# Altium PCB PCB1.PcbDoc
Units mil, origin at the board's own origin, x right, y up, seen from the top; angles counter-clockwise.
Board outline 1760 x 765 mil, 2 copper layers (Top Layer, Bottom Layer); 19 components, 17 nets, 62 pads, 10 vias.
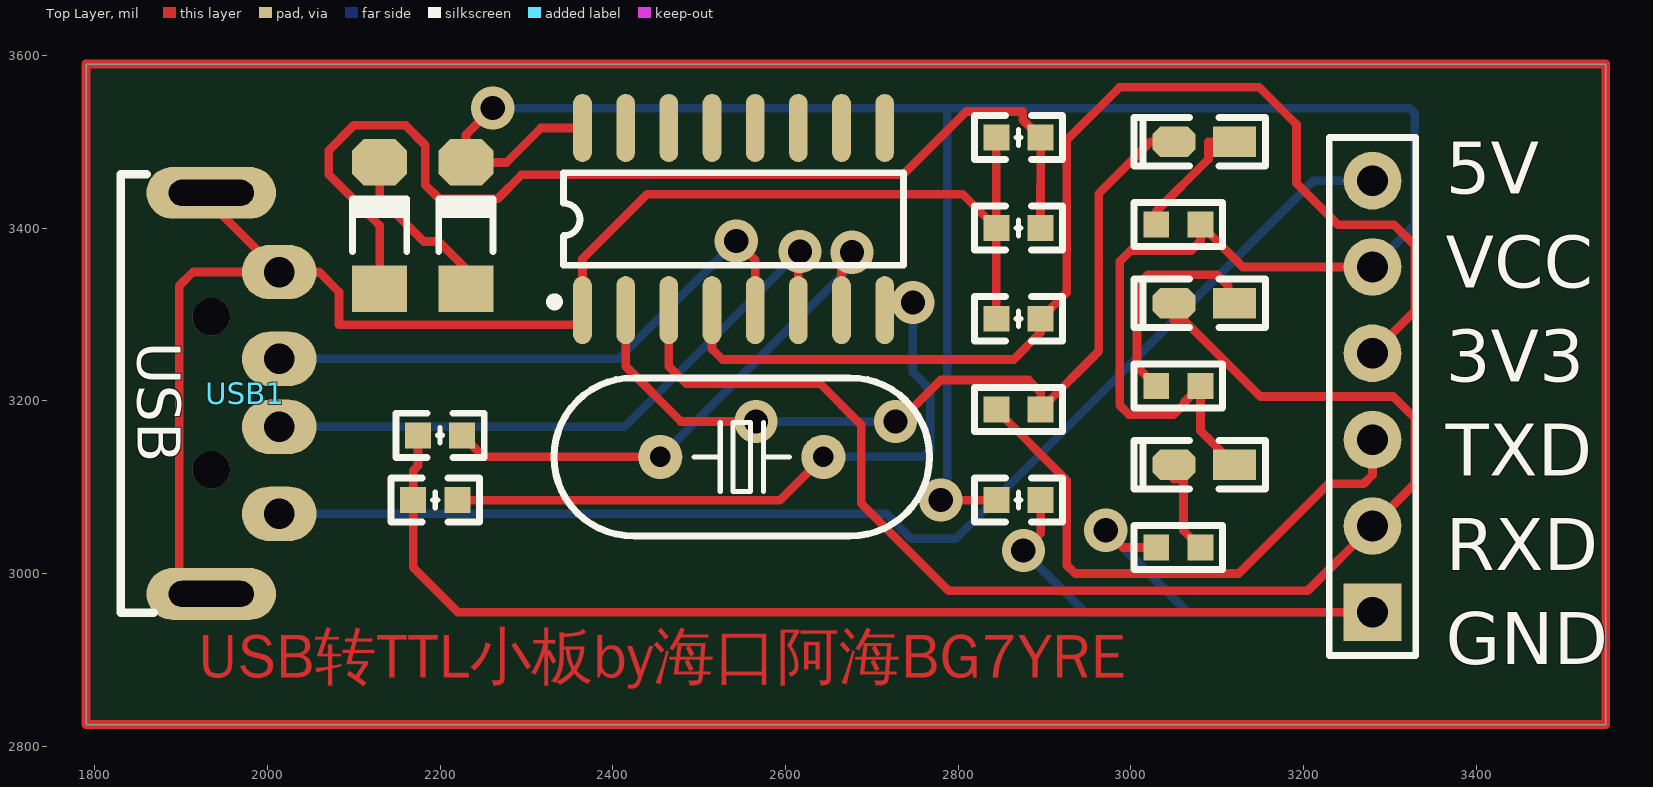
[diagram p0: Top Layer view]
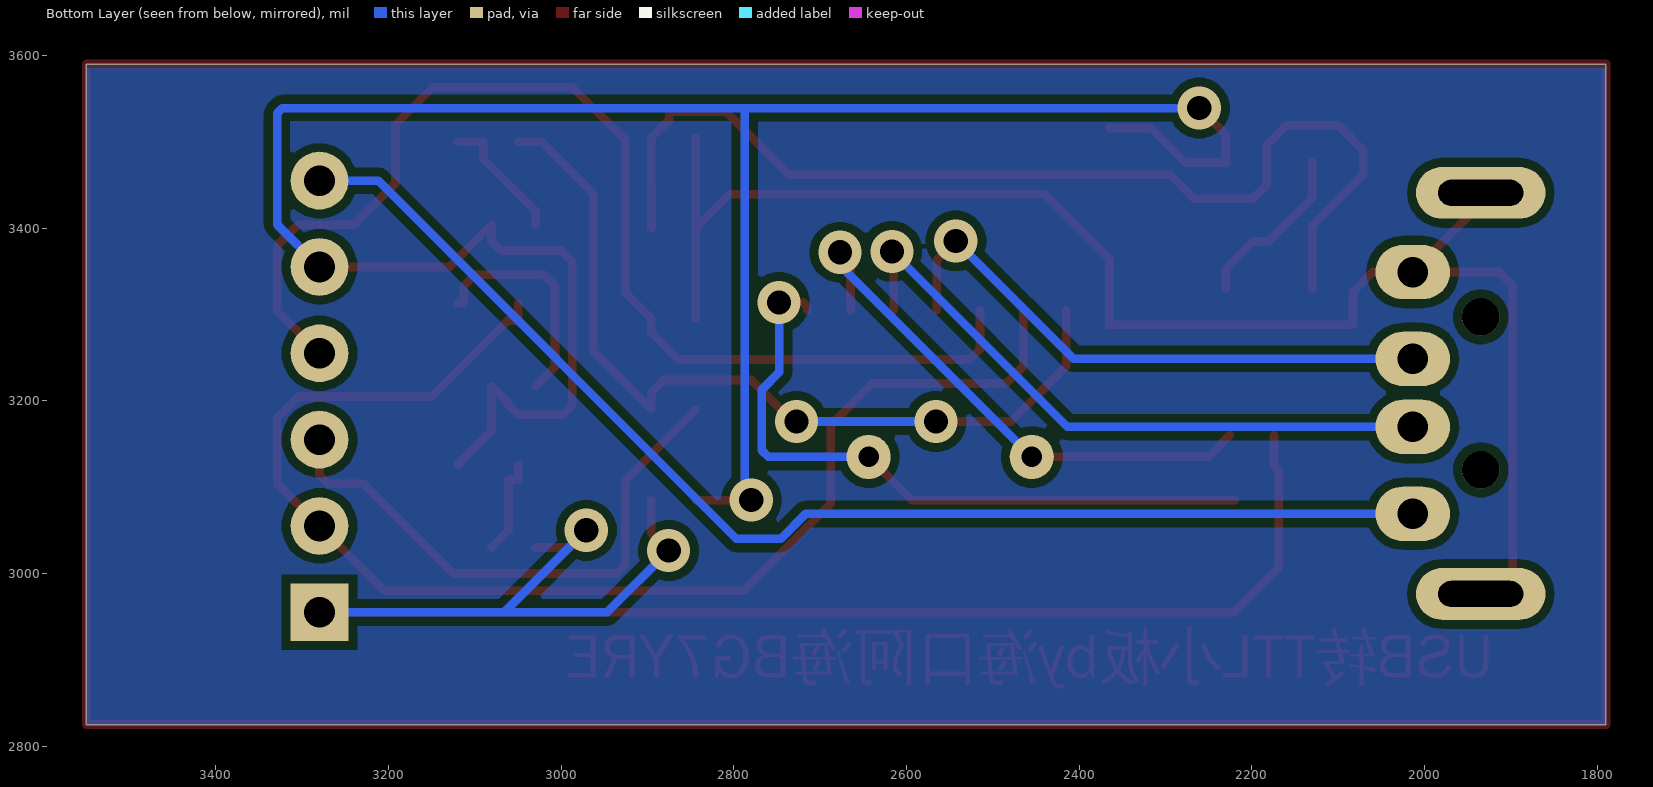
[diagram p1: Bottom Layer view, seen from below]

## Layer stack, top to bottom
Top Solder: solder mask 0.4, Solder Resist, Dk 3.5
Top Layer: signal copper 1.4
Dielectric 1: dielectric 12.6, FR-4, Dk 4.8
Bottom Layer: signal copper 1.4
Bottom Solder: solder mask 0.4, Solder Resist, Dk 3.5

## Board outline
1790,2825 1790,3590 3550,3590 3550,2825

## Design rules (kind name [scope] priority, off if disabled: settings)
Clearance [All] p1: gap=10 ignorepadtopadclearanceinfootprint=FALSE except(0: Arc-Hole Track-Hole SMDPad-Hole THPad-Hole Via-Hole Fill-Hole Poly-Hole Region-Hole Text-Hole)
PolygonConnect [All] p1: connectstyle=Relief reliefconductorwidth=10 reliefentries=4 polygonreliefangle="90 Angle" airgapwidth=10
RoutingVias [All] p1: holewidth=28 width=50 viastyle="Through Hole" minholewidth=28 minwidth=50 maxholewidth=28 maxwidth=50
SolderMaskExpansion [All] p1: expansion=4 istentingtop=FALSE
Width [All] p1: maxlimit=10 minlimit=10 preferedwidth=10
30 further rules are at their usual default settings.

## Components (designator, comment, footprint, x,y, rotation, side; value= is the part's Value field where it differs from the comment)
1uf "104" "C 0603_L" 2870,3085 r0 top
12M "OSC49S" "OSC HC-49S" 2549.49,3135 r0 top
C2 "1uf" "C 0603_L" 2870,3505 r0 top
C3 "0.1uf" "C 0603_L" 2870,3400 r0 top
C4 "0.1uf" "C 0603_L" 2870,3295 r0 top
C5 "22p" "C 0603_L" 2194.41,3085 r0 top
C6 "22p" "C 0603_L" 2200,3160 r0 top
D1 "1N4148" "MINI_MELF (LL34)" 2130,3403.03 r90 top
D2 "1N4148" "MINI_MELF (LL34)" 2230,3403.03 r90 top
JP1 "HDR-1X6" HDR2.54-LI-6P 3280,3205 r90 top
LED1 "电源LED红色" "LED 0603R" 3085,3126.19 r180 top
LED2 "RXLED蓝色" "LED 0603B" 3085,3313.22 r180 top
LED3 "TXLED绿色" "LED 0603G" 3085,3500.26 r180 top
R1 "1.5K" "R 0603_L" 3055.18,3217.04 r0 top
R2 "1.5K" "R 0603_L" 3055.18,3404.08 r0 top
R3 "1.5K" "R 0603_L" 3055.18,3030 r0 top
R4 "1K" "R 0603_L" 2870,3190 r0 top
U1 "CH340G" SOP16 2540,3410 r90 top
USB1 "USB" USB_A/P_A 1935,3208.58 r270 top

## Footprints (in the part's own frame and the unit in brackets; to place one, negate y for a bottom-side part, rotate by r counter-clockwise, add the part's x,y. Pads: shape width x height; smd on the part's side, far side on the other; paste and mask are expansions set on the pad)
"C 0603_L" [mil] "无极性贴片电容                                       淘宝ID:黄晶宝石"
  rect 30x30 smd: 1(-25.59,0) 2(25.59,0)
  silkscreen extent -51,-26 51,26, body extent -31,-16 31,16, height 32
HDR2.54-LI-6P [mm] "排针，6脚"
  rect 1.7x1.7 hole 0.9: 1(-6.35,0)
  round 1.7 hole 0.9: 2(-3.81,0) 3(-1.27,0) 4(1.27,0) 5(3.81,0) 6(6.35,0)
  silkscreen extent -7.62,-1.27 7.62,1.27, body extent -7.62,-1.27 7.62,1.27, height 8.5
"LED 0603B" [mil] "蓝色0603LED                             淘宝ID:黄晶宝石"
  rect 50x35 smd: 1(-35,0.26)
  oct 50x35 smd: 2(35,0.26)
  silkscreen extent -71,-28 81,28, body extent -31,-16 32,16, height 24
"LED 0603G" [mil] "绿色0603LED                                   淘宝ID:黄晶宝石"
  rect 50x35 smd: 1(-35,0.26)
  oct 50x35 smd: 2(35,0.26)
  silkscreen extent -71,-28 81,28, body extent -31,-16 32,16, height 18
"LED 0603R" [mil] "红色0603LED                                           淘宝ID:黄晶宝石"
  rect 50x35 smd: 1(-35,0.26)
  oct 50x35 smd: 2(35,0.26)
  silkscreen extent -71,-28 81,28, body extent -31,-16 31,16, height 18
"MINI_MELF (LL34)" [mm] "1.5*3.4mm(直径，脚距）"
  rect 1.37x1.62 smd: 1(-1.855,0)
  oct 1.37x1.62 smd: 2(1.855,0)
  silkscreen extent -0.76,-0.8 0.78,0.8, body extent -1.7,-0.75 1.7,0.75, height 1.5
"OSC HC-49S" [mm] "封装库来自淘宝卖家 ID：黄晶宝石"
  round 1.3 hole 0.6: 1(-2.4,0) 2(2.4,0)
  silkscreen extent -5.52,-2.32 5.52,2.33, body extent -5.52,-2.32 5.53,2.33, height 4.13
"R 0603_L" [mil] "1/10W贴片电阻                 淘宝ID:黄晶宝石"
  rect 30x30 smd: 1(-25.59,0) 2(25.59,0)
  silkscreen extent -51,-26 51,26, body extent -31,-16 32,16, height 16
SOP16 [mm] "封装库来自淘宝卖家 ID：黄晶宝石"
  oval 2x0.55 smd: 1(-2.667,4.445) 2(-2.667,3.175) 3(-2.667,1.905) 4(-2.667,0.635) 5(-2.667,-0.635) 6(-2.667,-1.905) 7(-2.667,-3.175) 8(-2.667,-4.445) 9(2.692,-4.445) 10(2.692,-3.175) 11(2.692,-1.905) 12(2.692,-0.635) 13(2.692,0.635) 14(2.692,1.905) 15(2.692,3.175) 16(2.692,4.445)
  silkscreen extent -2.55,-5 1.37,5.39, body extent -2.92,-4.99 2.98,4.99, height 1.45
USB_A/P_A [mm] "A型USB 插头，20*13*4.5mm"
  round 1.1 hole 1.1: 0(-2.25,0) 0(2.25,0)
  oval 1.6x2.2 hole 0.9: 1(3.543,2) 2(0.987,2) 3(-1.013,2) 4(-3.569,2)
  oval 1.524x3.81 hole 0.762 slot 2.5 at 90 deg: 4(-5.9,0) 4(5.9,0)
  silkscreen extent -6.45,-2.67 6.45,-1.7, body extent -6.47,-17.9 6.47,2.1, height 3.25

## Part data
1uf C2 C3 C4 C5 C6: library part C, "贴片电容", BOM名称=无极性贴片电容, 唯一出售店铺网址=https://shop463601444.taobao.com, 淘宝ID="封装库来自淘宝 ID：黄晶宝石", 联系售后，技术支持=https://shop463601444.taobao.com
12M: "晶振49S"
D1 D2: "开关二极管", BOM名称=高速开关二极管, 欢迎光临=https://shop463601444.taobao.com, 淘宝ID="封装库来自淘宝 ID：黄晶宝石"
JP1: library part "Header 6", "6P接插件", BOM名称=6P接插件, 学习资源=https://shop463601444.taobao.com, 版权归属="封装库来自淘宝 ID：黄晶宝石"
LED1 LED2 LED3: library part LED-SMD, "贴片LED", BOM名称=贴片LED, 学习资源=https://shop463601444.taobao.com, 版权归属="封装库来自淘宝 ID：黄晶宝石"
R1 R2 R3 R4: library part R, "贴片电阻", BOM名称=贴片电阻, 封装库来自淘宝卖家 ID：黄晶宝石=其他店铺购入均为盗版，不享受售后技术支持服务，请立即申请退款, 版权归属="来自淘宝 ID：黄晶宝石", 联系售后=https://shop463601444.taobao.com
U1: "USB总线转接芯片"
USB1: library part USB-A/P, "USB-A型公接口", BOM名称=USB-A型公接口, 学习资源=https://shop463601444.taobao.com, 版权归属="封装库来自淘宝卖家 ID：黄晶宝石"

## Via types
v1: diameter 50, hole 28, Top Layer to Bottom Layer, 10 vias

## Nets (pads, with @x,y where several pads share a name; then routed paths per layer and width w, separated by ;. In a path a pad name is that pad's centre, name@x,y a point inside that pad or via, vN(x,y) a via of type N, cw(c..) or ccw(c..) an arc to the next point about the centre after c; other vN are vias at no path point)
340RXD: JP1.2 LED2.2 U1.3 | length 1563.1
  Top Layer w10: U1.3 2465,3240 2485,3220 2640,3220 2687.65,3172.35 2687.65,3081.35 2789,2980 3205,2980 JP1.2 3329,3104 3329,3180 3304,3205 3150,3205 3062,3293 3050,3293 LED2.2
340TXD: LED3.2 R4.2 U1.2 | length 1007.6
  Top Layer w10: U1.2 2415,3240 2479,3176 v1(2566,3176) ; v1(2727.65,3176) 2732,3176 2780,3224 2881.59,3224 2895.59,3210 R4.2 2963,3257.41 2963,3440 3023,3500 LED3.2
  Bottom Layer w10: v1(2566,3176) v1(2727.65,3176)
GND: 1uf.2 C5.1 C6.1 JP1.1 R3.1 | length 1990.1
  Top Layer w10: C6.1 2174.41,3124.59 2168.82,3119 C5.1 2168.82,3007 2220.82,2955 JP1.1 ; v1(2875.59,3026.41) 2895.59,3046.41 1uf.2 ; v1(2971,3050) 2991,3030 R3.1
  Bottom Layer w10: v1(2875.59,3026.41) 2947,2955 3066,2955 ; v1(2971,3050) 3066,2955 ; JP1.1 3066,2955
Net1uf_1: 1uf.1 D2.2 JP1.5 LED1.1 R1.2 R2.2 U1.16 | length 2746.7
  Top Layer w10: v1(2261,3539) 2230,3508 D2.2 2277,3476.06 2316.94,3516 U1.16 ; v1(2780,3085) 1uf.1 ; LED1.1 3080.77,3165.16 R1.2 3062,3198.26 3062,3196 3050,3184 2998,3184 2987.26,3194.74 2987.26,3361.26 3000,3374 3070,3374 3080.77,3384.77 R2.2 3129.84,3355 JP1.5
  Bottom Layer w10: v1(2261,3539) 2787.65,3539 ; v1(2780,3085) 2787.65,3092.65 2787.65,3539 ; JP1.5 3329,3404 3329,3533.14 3323.14,3539 2787.65,3539
Net12M_1: 12M.1 C6.2 U1.7 | length 640.7
  Top Layer w10: C6.2 2250.58,3135 12M.1 ; U1.7 2665,3360 v1(2677,3372)
  Bottom Layer w10: 12M.1 2677,3357 v1(2677,3372)
Net12M_2: 12M.2 C5.2 U1.8 | length 789.7
  Top Layer w10: C5.2 2593.98,3085 12M.2 ; U1.8 2715,3308.62 2720.38,3314 v1(2747.65,3314)
  Bottom Layer w10: 12M.2 2760,3135 2767.65,3142.65 2767.65,3212.91 2747.65,3232.91 v1(2747.65,3314)
NetC2_1: C2.1 C3.1 C4.1 U1.1 USB1.4 | length 1852.6
  Top Layer w10: USB1.4@1935,2976.3 1898,2976.3 1898,3333.1 1914,3349.1 USB1.4@2013.74,3349.1 ; USB1.4@1935,3440.87 1935,3427.84 USB1.4@2013.74,3349.1 ; C4.1 C3.1 ; C2.1 C3.1 ; USB1.4@2013.74,3349.1 2060,3349.1 2083,3326.1 2083,3288 2365,3288 U1.1 2365,3364.41 2440,3439.41 2805,3439.41 C3.1
NetC2_2: C2.2 C3.2 D1.1 | length 1248
  Top Layer w10: D1.1 2130,3403 2071,3462 2071,3490 2100,3519 2160,3519 2183,3496 2183,3450 2199,3434 2266.78,3434 2294.41,3461.63 2736,3461.63 2809.37,3535 2875,3535 2875,3525.58 C2.2 2895.59,3450.08 2895.51,3450 2895.51,3400.08 C3.2
NetD1_2: D1.2 D2.1 | length 197.8
  Top Layer w10: D1.2 2130,3435.4 2180.99,3384.41 2198.59,3384.41 2230,3353 D2.1
NetJP1_3: JP1.3 R4.1 | length 660.4
  Top Layer w10: R4.1 2844.41,3189.19 2926,3107.59 2926,3009.59 2935.59,3000 3125,3000 3229,3104 3270,3104 3280,3114 JP1.3
NetLED1_2: LED1.2 R3.2 | length 115.2
  Top Layer w10: LED1.2 3050,3109.14 3061.15,3109.14 3061.15,3049.62 R3.2
NetLED2_1: LED2.1 R1.1 | length 268.9
  Top Layer w10: R1.1 3007.26,3239.36 3007.26,3333.26 3020,3346 3100,3346 3113,3333 3113,3312.96 LED2.1
NetLED3_1: LED3.1 R2.1 | length 151
  Top Layer w10: R2.1 3029.59,3419.59 3090,3480 3090,3500 LED3.1
NetU1_5: U1.5 USB1.3 | length 674.9
  Top Layer w10: v1(2543,3385) 2565,3363 U1.5
  Bottom Layer w10: USB1.3 2406.47,3248.47 v1(2543,3385)
NetU1_6: U1.6 USB1.2 | length 756.3
  Top Layer w10: U1.6 2615,3371 v1(2617,3373)
  Bottom Layer w10: USB1.2 2413.73,3169.73 v1(2617,3373)
V3: C4.2 JP1.4 U1.4 | length 1368.4
  Top Layer w10: U1.4 2515,3260 2527.23,3247.77 2864.36,3247.77 2895.59,3279 C4.2 2926,3325.41 2926,3502 2987,3563 3149,3563 3192,3520 3192,3452 3240,3404 3305,3404 3329,3380 3329,3304 JP1.4
VCC: JP1.6 USB1.1 | length 1450.2
  Bottom Layer w10: USB1.1 2716.69,3069.1 2745.79,3040 2797,3040 3212,3455 JP1.6
pads on no net: U1.9 U1.10 U1.11 U1.12 U1.13 U1.14 U1.15 USB1.0
copper on no net: | length 5050
  Top Layer w10: 1790,2825 3550,2825 3550,3590 1790,3590 1790,2825

## Polygon pours and split planes (outlines as drawn)
no net on Bottom Layer "NONET_L02_P000" (solid, pour order 0): 1790,3585 3550,3585 3550,2830 3555,2825 1790,2825

## Other copper
Top Layer:
  text "USB转TTL小板by海口阿海BG7YRE" at 1920,2861.91 h90

## Silkscreen, mask and mechanical layers (free items; w line width, h text height)
Top Overlay:
  text "5V" at 3365,3440 h60
  text "VCC" at 3365,3331 h60
  text "3V3" at 3365,3222 h60
  text "TXD" at 3365,3113 h60
  text "RXD" at 3365,3004 h60
  text "GND" at 3365,2895 h60